# Altium PCB 电磁阀驱动板.PcbDoc
Units mm, origin at the board's own origin, x right, y up, seen from the top; angles counter-clockwise.
Board outline 55 x 54.99 mm, 2 copper layers (Top Layer, Bottom Layer); 70 components, 47 nets, 188 pads, 4 vias.
Unrouted connection lines stored in the file: 71.
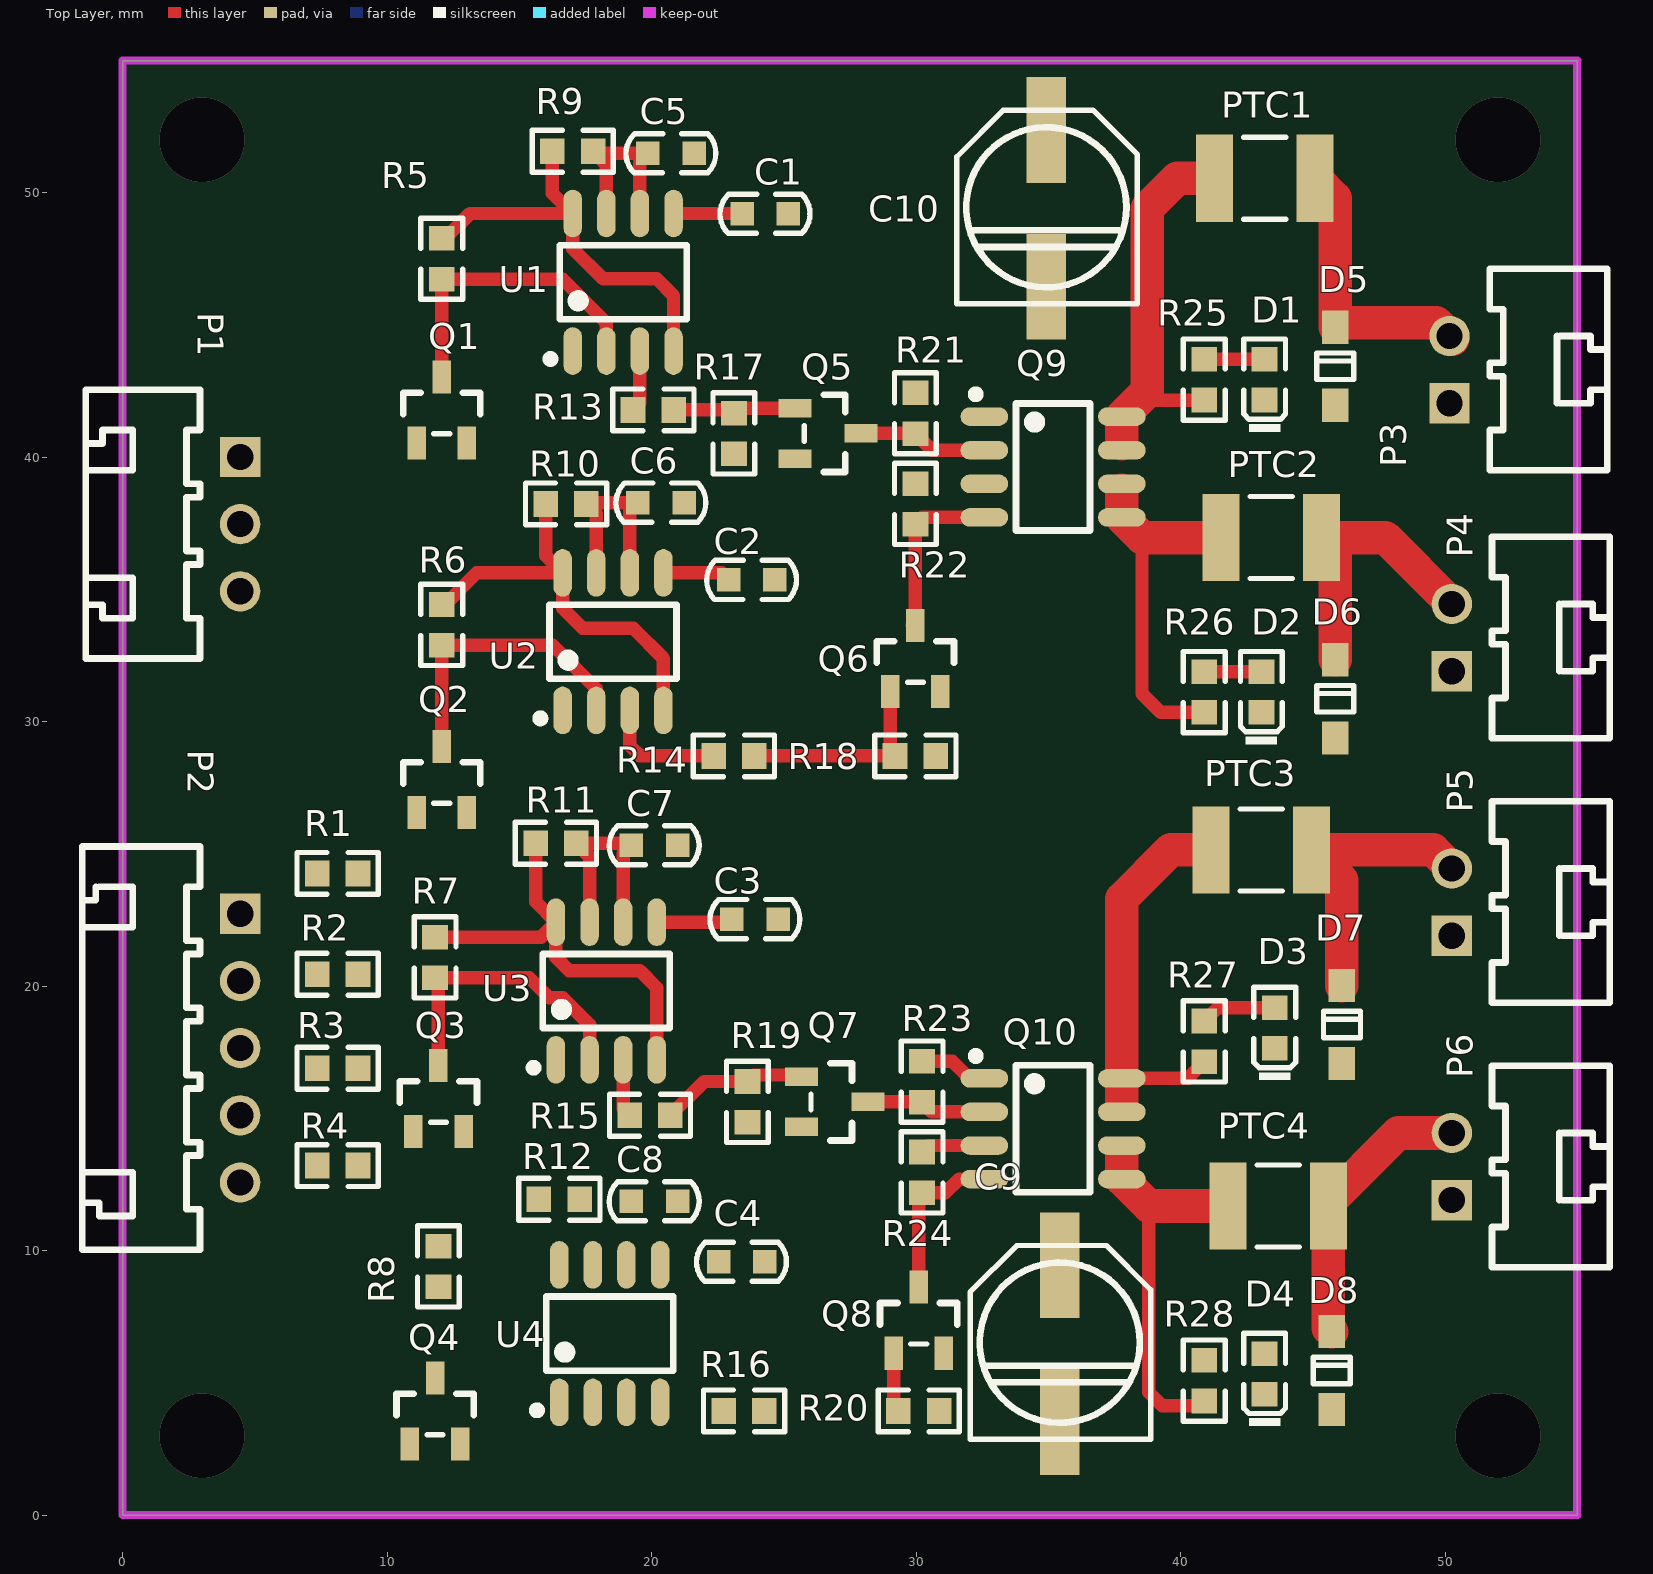
[diagram p0: Top Layer view]
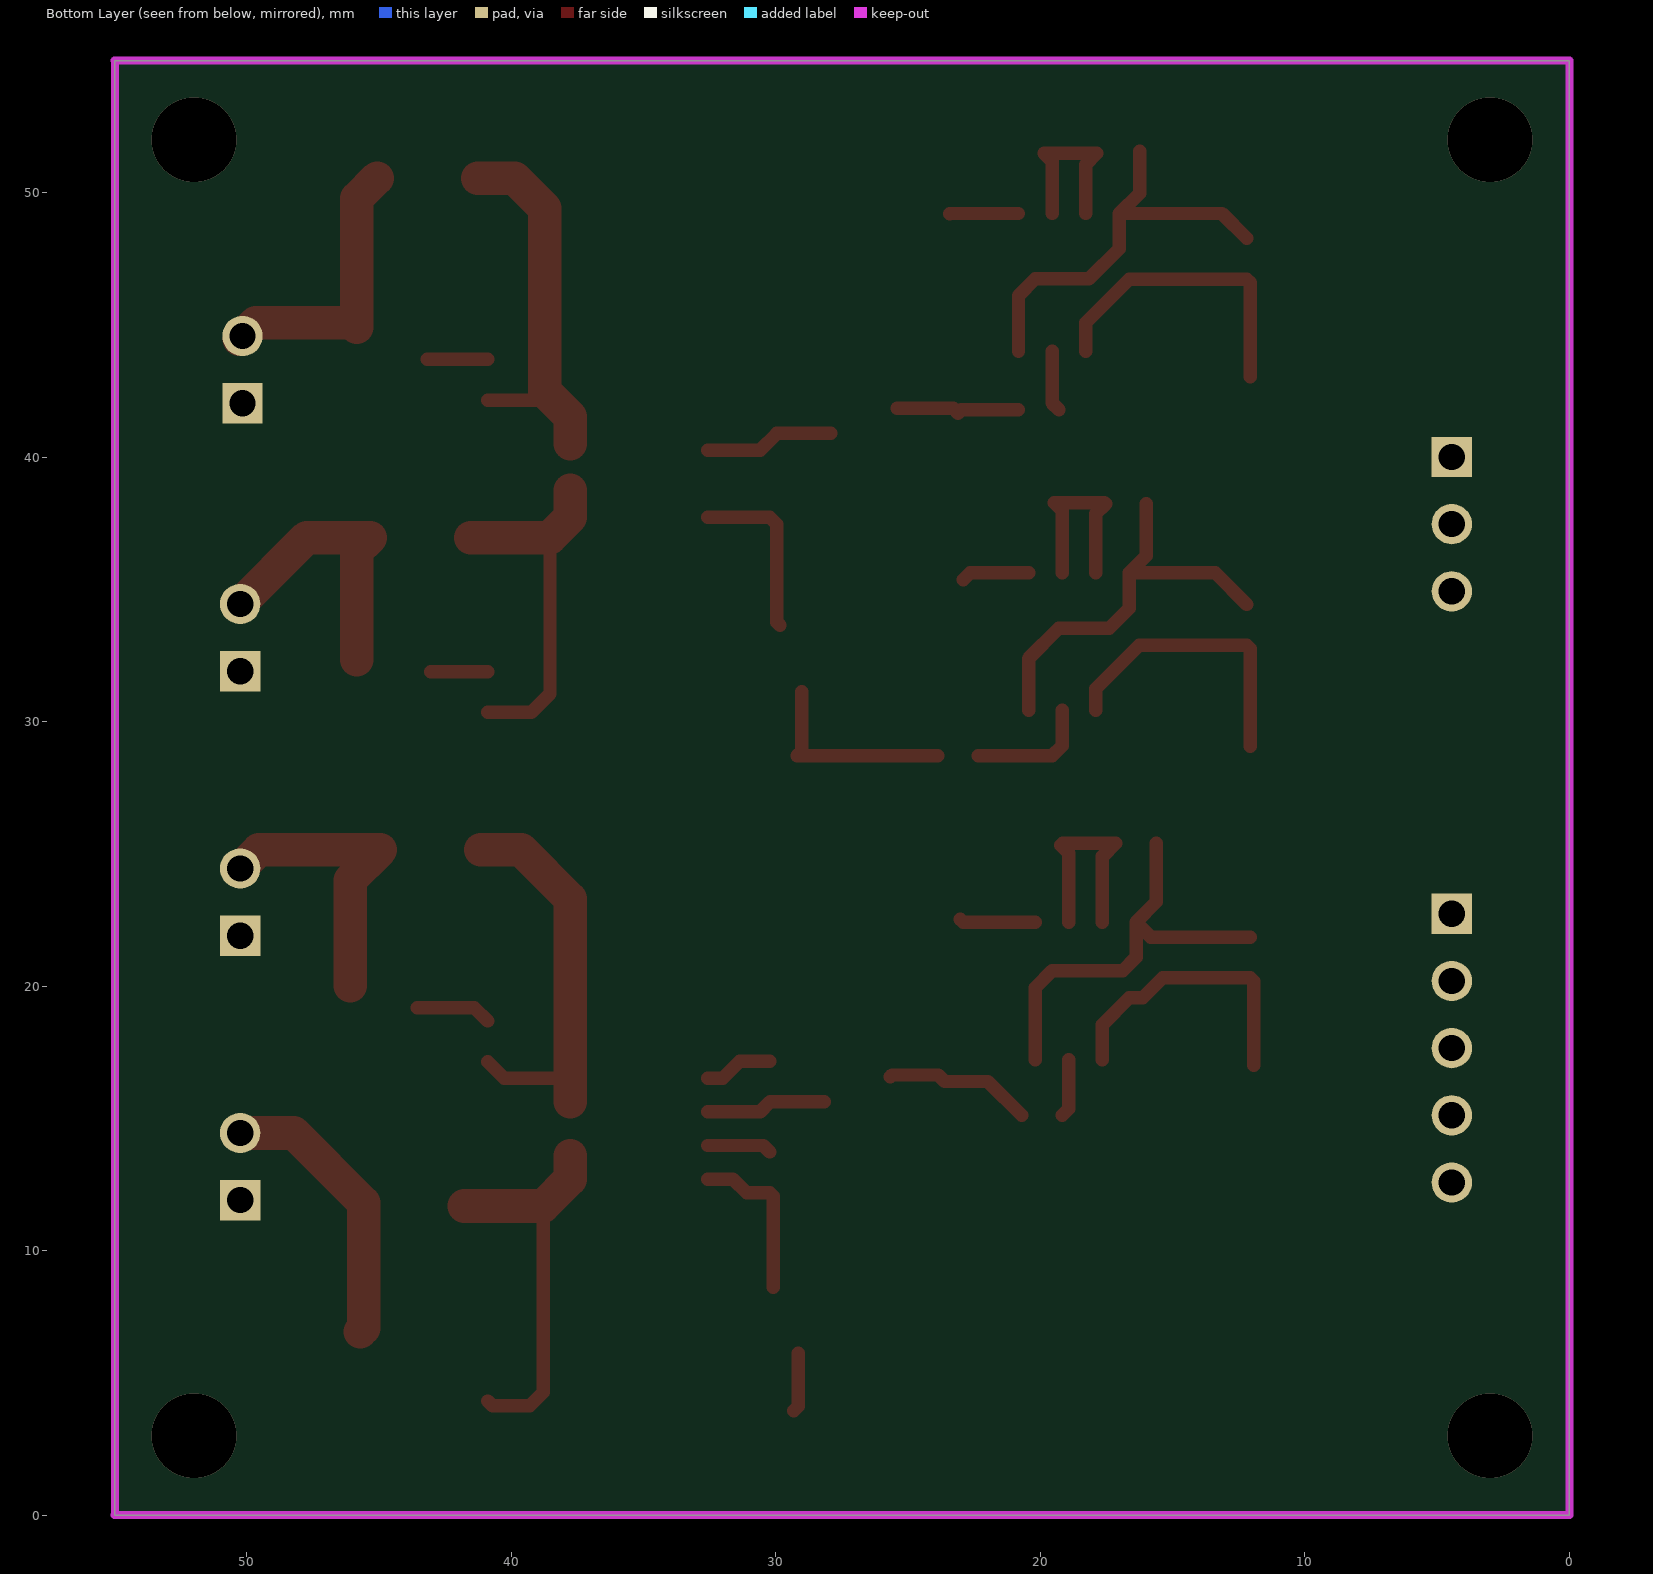
[diagram p1: Bottom Layer view, seen from below]

## Layer stack, top to bottom
Top Layer: signal copper 0.0356
Dielectric: dielectric 0.32, FR-4, Dk 4.8
Bottom Layer: signal copper 0.0356

## Board outline
0,54.991 54.991,54.991 54.991,0.009 55,0 0,0

## Design rules (kind name [scope] priority, off if disabled: settings)
Clearance [All] p1: gap=0.254
PolygonConnect [All] p1: connectstyle=Relief reliefconductorwidth=0.254 reliefentries=4 polygonreliefangle="90 Angle"
RoomDefinition 电磁阀驱动 [InComponentClass('电磁阀驱动')] p1: confinementstyle=ConfineIn formatcopy=TRUE outline 0,0 54.991,0 54.991,54.991 0,54.991
RoutingVias [All] p1: holewidth=0.711 width=1.27 viastyle="Through Hole" minholewidth=0.711 minwidth=1.27 maxholewidth=0.711 maxwidth=1.27
SilkscreenOverComponentPads [All] p1: minsilkscreentomaskgap=0.254
SolderMaskExpansion [All] p1: expansion=0.102
Width [All] p1: maxlimit=25.4 minlimit=0.254 preferedwidth=0.254
27 further rules are at their usual default settings.

## Components (designator, comment, footprint, x,y, rotation, side; value= is the part's Value field where it differs from the comment)
C1 "Cap" 0603C 24.257,49.149 r180 top
C2 "Cap" 0603C 23.749,35.306 r180 top
C3 "Cap" 0603C 23.876,22.479 r180 top
C4 "Cap" 0603C 23.368,9.525 r180 top
C5 "Cap" 0603C 20.701,51.435 r180 top
C6 "Cap" 0603C 20.32,38.227 r180 top
C7 "Cap" 0603C 20.066,25.273 r180 top
C8 "Cap" 0603C 20.066,11.811 r180 top
C9 "47uF 25v" CAP_SMD_6*7 35.433,6.477 r0 top
C10 "47uF 25v" CAP_SMD_6*7 34.925,49.403 r0 top
D1 "绿灯 0603" 0603_LED_S1 43.18,42.926 r90 top
D2 "绿灯 0603" 0603_LED_S1 43.053,31.115 r90 top
D3 "绿灯 0603" 0603_LED_S1 43.561,18.415 r90 top
D4 "绿灯 0603" 0603_LED_S1 43.18,5.334 r90 top
D5 "B5819W  SL" SOD-123 45.847,43.434 r270 top
D6 "B5819W  SL" SOD-123 45.847,30.861 r270 top
D7 "B5819W  SL" SOD-123 46.101,18.542 r270 top
D8 "B5819W  SL" SOD-123 45.72,5.461 r270 top
P1 "Header 3" sip-3 4.445,40.005 r270 top
P2 "Header 5" SIP-5 4.445,22.733 r270 top
P3 "Header 2" SIP-2 50.165,42.037 r90 top
P4 "Header 2" SIP-2 50.254,31.905 r90 top
P5 "Header 2" SIP-2 50.254,21.905 r90 top
P6 "Header 2" SIP-2 50.254,11.905 r90 top
PTC1 "SMD1812P300TF/16" 1812 43.18,50.546 r0 top
PTC2 "SMD1812P300TF/16" 1812 43.434,36.957 r0 top
PTC3 "SMD1812P300TF/16" 1812 43.053,25.146 r0 top
PTC4 "SMD1812P300TF/16" 1812 43.688,11.684 r0 top
Q1 "SS8050 Y1" SOT-23(SOT-23-3) 12.065,41.783 r270 top
Q2 "SS8050 Y1" SOT-23(SOT-23-3) 12.065,27.813 r270 top
Q3 "SS8050 Y1" SOT-23(SOT-23-3) 11.938,15.748 r270 top locked
Q4 "SS8050 Y1" SOT-23(SOT-23-3) 11.811,3.937 r270 top
Q5 "SS8050 Y1" SOT-23(SOT-23-3) 26.67,40.894 r180 top
Q6 "SS8050 Y1" SOT-23(SOT-23-3) 29.972,32.385 r270 top
Q7 "SS8050 Y1" SOT-23(SOT-23-3) 26.924,15.621 r180 top
Q8 "SS8050 Y1" SOT-23(SOT-23-3) 30.099,7.366 r270 top
Q9 "AO4803A" SOP-8_150mil 35.179,39.624 r270 top
Q10 "AO4803A" SOP-8_150mil 35.179,14.605 r270 top
R1 "100Ω  ±1%" 0603_R 8.128,24.257 r180 top locked
R2 "100Ω  ±1%" 0603_R 8.128,20.447 r180 top locked
R3 "100Ω  ±1%" 0603_R 8.128,16.891 r180 top locked
R4 "100Ω  ±1%" 0603_R 8.128,13.208 r180 top locked
R5 "10KΩ (102) ±1%" 0603_R 12.065,47.498 r90 top
R6 "10KΩ (102) ±1%" 0603_R 12.065,33.655 r90 top
R7 "10KΩ (102) ±1%" 0603_R 11.811,21.082 r90 top
R8 "10KΩ (102) ±1%" 0603_R 11.938,9.398 r90 top
R9 "3KΩ (3001) ±1%" 0603_R 17.018,51.562 r0 top locked
R10 "3KΩ (3001) ±1%" 0603_R 16.764,38.227 r0 top locked
R11 "3KΩ (3001) ±1%" 0603_R 16.383,25.4 r0 top locked
R12 "3KΩ (3001) ±1%" 0603_R 16.51,11.938 r0 top locked
R13 "3KΩ (3001) ±1%" 0603_R 20.066,41.783 r0 top
R14 "3KΩ (3001) ±1%" 0603_R 23.114,28.702 r0 top
R15 "3KΩ (3001) ±1%" 0603_R 19.939,15.113 r0 top
R16 "3KΩ (3001) ±1%" 0603_R 23.495,3.937 r0 top
R17 "10KΩ (102) ±1%" 0603_R 23.114,40.894 r90 top
R18 "10KΩ (102) ±1%" 0603_R 29.972,28.702 r180 top
R19 "10KΩ (102) ±1%" 0603_R 23.622,15.621 r90 top
R20 "10KΩ (102) ±1%" 0603_R 30.099,3.937 r180 top
R21 "10KΩ (102) ±1%" 0603_R 29.972,41.656 r90 top
R22 "10KΩ (102) ±1%" 0603_R 29.972,38.227 r90 top
R23 "10KΩ (102) ±1%" 0603_R 30.226,16.383 r90 top
R24 "10KΩ (102) ±1%" 0603_R 30.226,12.954 r90 top
R25 "3KΩ (3001) ±1%" 0603_R 40.894,42.926 r90 top
R26 "3KΩ (3001) ±1%" 0603_R 40.894,31.115 r90 top
R27 "3KΩ (3001) ±1%" 0603_R 40.894,17.907 r90 top
R28 "3KΩ (3001) ±1%" 0603_R 40.894,5.08 r90 top
U1 "NE555DR" SOIC-8_150mil 18.923,46.609 r0 top
U2 "NE555DR" SOIC-8_150mil 18.542,33.02 r0 top
U3 "NE555DR" SOIC-8_150mil 18.288,19.812 r0 top
U4 "NE555DR" SOIC-8_150mil 18.415,6.858 r0 top

## Footprints (in the part's own frame and the unit in brackets; to place one, negate y for a bottom-side part, rotate by r counter-clockwise, add the part's x,y. Pads: shape width x height; smd on the part's side, far side on the other; paste and mask are expansions set on the pad)
0603_LED_S1 [mm]
  rect 0.93x0.98 smd: A(0.77,0) K(-0.77,0)
  silkscreen extent -1.98,-0.79 1.54,0.79, body extent -0.8,-0.4 0.8,0.4, height 0.6
0603_R [mm]
  rect 0.93x0.98 smd: 1(-0.77,0) 2(0.77,0)
  silkscreen extent -1.53,-0.79 1.54,0.79, body extent -0.85,-0.4 0.85,0.4, height 0.56
0603C [mil]
  rect 35x35 smd: 1(-36,-2) 2(33,-2)
  silkscreen extent -68,-31 66,27
1812 [mm] "Chip Capacitor, Body 4.5x3.2mm, IPC Hig"
  rect 1.4x3.3 smd: 1(-1.9,0) 2(1.9,0)
  silkscreen extent -0.8,-1.55 0.8,1.55, body extent -2.4,-1.7 2.4,1.7, height 1.4
CAP_SMD_6*7 [mm] "贴"
  rect 1.5x4 smd: 1(0,2.965) 2(0,-2.965)
  silkscreen extent -3.39,-3.61 3.44,3.71, body extent -3.29,-3.51 3.31,3.49, height 5.4
SIP-2 [mil]
  rect 60x60 hole 39: 1(0,0)
  round 60 hole 39: 2(100,0)
  silkscreen extent -100,-235 200,-60
sip-3 [mil]
  rect 60x60 hole 39: 1(0,0)
  round 60 hole 39: 2(100,0) 3(200,0)
  silkscreen extent -100,-230 300,-60
SIP-5 [mil]
  rect 60x60 hole 39: 1(0,0)
  round 60 hole 39: 2(100,0) 3(200,0) 4(300,0) 5(400,0)
  silkscreen extent -100,-235 500,-60
SOD-123 [mm]
  rect 1.25x1 smd: 1(1.475,0) 2(-1.475,0)
  silkscreen extent -0.5,-0.7 0.5,0.7, body extent -1.85,-0.77 1.85,0.78, height 1.35
SOIC-8_150mil [mm]
  oval 0.7x1.8 smd: 1(-1.905,-2.6) 2(-0.635,-2.6) 3(0.635,-2.6) 4(1.905,-2.6) 5(1.905,2.6) 6(0.635,2.6) 7(-0.635,2.6) 8(-1.905,2.6)
  silkscreen extent -2.9,-3.05 2.4,1.4
SOP-8_150mil [mm]
  oval 0.7x1.8 smd: 1(-1.905,-2.6) 2(-0.635,-2.6) 3(0.635,-2.6) 4(1.905,-2.6) 5(1.905,2.6) 6(0.635,2.6) 7(-0.635,2.6) 8(-1.905,2.6)
  silkscreen extent -2.9,-3.07 2.4,1.4, body extent -2.5,-3.1 2.5,3.1, height 1.75
SOT-23(SOT-23-3) [mm]
  rect 1.25x0.7 smd: 1(1.25,-0.95) 2(1.25,0.95) 3(-1.25,0)
  silkscreen extent -0.65,-1.46 0.9,1.46, body extent -1.5,-1.5 1.5,1.5, height 1.3

## Part data
C1 C2 C3 C4 C5 C6 C7 C8: "Capac"
C9 C10: library part "Cap Pol1", "Polarized Capacitor (Radial)"
D1 D2 D3 D4: library part "0603 绿灯"
D5 D6 D7 D8: library part "SOD-123 B5819W  SL", "Ф"
P1: "Header, 3"
P2: "Header, 5"
P3 P4 P5 P6: "Header, 2"
PTC1 PTC2 PTC3 PTC4: library part "0603 3KΩ (3001) 1%", "贴片电阻"
Q1 Q2 Q3 Q4 Q5 Q6 Q7 Q8: library part "SOT-23 SS8050 Y1"
Q9 Q10: library part APM4953KC-TRG, "MOS(³"
R1 R2 R3 R4 R5 R6 R7 R8 R9 R10 R11 R12 R13 R14 R15 R16 R17 R18 R19 R20 R21 R22 R23 R24 R25 R26 R27 R28: library part "0603 3KΩ (3001) 1%"
U1 U2 U3 U4: library part NE555DR_[C7593]

## Via types
v1: diameter 3.2, hole 3.2, Top Layer to Bottom Layer, 4 vias

## Nets (pads, with @x,y where several pads share a name; then routed paths per layer and width w, separated by ;. In a path a pad name is that pad's centre, name@x,y a point inside that pad or via, vN(x,y) a via of type N, cw(c..) or ccw(c..) an arc to the next point about the centre after c; other vN are vias at no path point)
GND: C1.1 C2.1 C3.1 C4.1 C5.1 C6.1 C7.1 C8.1 C9.2 C10.2 D1.K D2.K D3.K D4.K D5.1 D6.1 D7.1 D8.1 P1.3 P2.5 P3.1 P4.1 P5.1 P6.1 Q1.2 Q2.2 Q3.2 Q4.2 Q5.2 Q6.2 Q7.2 Q8.2 R17.1 R18.1 R19.1 R20.1 U1.1 U2.1 U3.1 U4.1
NetC1_2: C1.2 U1.5 | length 2.6
  Top Layer w0.508: U1.5 23.41,49.209 C1.2
NetC2_2: C2.2 U2.5 | length 2.6
  Top Layer w0.508: U2.5 22.648,35.62 C2.2
NetC3_2: C3.2 U3.5 | length 2.9
  Top Layer w0.508: U3.5 22.92,22.412 C3.2
NetC4_2: C4.2 U4.5
NetC5_2: C5.2 R9.2 U1.6 U1.7 | length 6.9
  Top Layer w0.508: U1.7 18.288,51.062 17.864,51.486 C5.2 19.558,51.181 U1.6
NetC6_2: C6.2 R10.2 U2.6 U2.7 | length 7.5
  Top Layer w0.508: U2.7 17.907,37.854 R10.2 17.585,38.278 C6.2 19.177,37.973 U2.6
NetC7_2: C7.2 R11.2 U3.6 U3.7 | length 8.3
  Top Layer w0.508: U3.7 17.653,24.9 R11.2 19.152,25.4 C7.2 18.923,25.019 U3.6
NetC8_2: C8.2 R12.2 U4.6 U4.7
NetD1_A: D1.A R25.2 | length 2.3
  Top Layer w0.508: R25.2 D1.A
NetD2_A: D2.A R26.2 | length 2.2
  Top Layer w0.508: R26.2 D2.A
NetD3_A: D3.A R27.2 | length 2.9
  Top Layer w0.508: R27.2 41.402,19.185 D3.A
NetD4_A: D4.A R28.2
NetD5_2: D5.2 P3.2 PTC1.2 | length 10.7
  Top Layer w1.27: PTC1.2 45.847,49.779 D5.2 46.023,45.085 49.657,45.085 P3.2@50.292,44.45
NetD6_2: D6.2 P4.2 PTC2.2 | length 10.8
  Top Layer w1.27: D6.2 45.847,36.444 PTC2.2 47.742,36.957 P4.2
NetD7_2: D7.2 P5.2 PTC3.2 | length 11.2
  Top Layer w1.27: D7.2 46.101,23.998 PTC3.2 49.553,25.146 P5.2
NetD8_2: D8.2 P6.2 PTC4.2 | length 10.7
  Top Layer w1.27: D8.2 45.588,7.068 PTC4.2 45.588,11.806 48.227,14.445 P6.2
NetP2_1: P2.1 R1.2
NetP2_2: P2.2 R2.2
NetP2_3: P2.3 R3.2
NetP2_4: P2.4 R4.2
NetPTC1_1: PTC1.1 Q9.7 Q9.8 R25.1 | length 15.7
  Top Layer w0.508: Q9.8 38.406,42.156 R25.1
  Top Layer w1.27: Q9.7@37.779,40.513 Q9.8 38.735,42.485 38.735,49.403 39.878,50.546 PTC1.1
NetPTC2_1: PTC2.1 Q9.5 Q9.6 R26.1 | length 13.6
  Top Layer w0.508: 38.541,36.957 38.541,31.055 39.251,30.345 R26.1
  Top Layer w1.27: Q9.6@37.779,38.735 Q9.5 38.541,36.957 PTC2.1
NetPTC3_1: PTC3.1 Q10.7 Q10.8 R27.1 | length 15.2
  Top Layer w0.508: Q10.8 40.267,16.51 R27.1
  Top Layer w1.27: 37.779,15.621 Q10.8 37.779,23.301 39.624,25.146 PTC3.1
NetPTC4_1: PTC4.1 Q10.5 Q10.6 R28.1 | length 14.7
  Top Layer w0.508: 38.795,11.684 38.795,4.639 39.303,4.131 40.715,4.131 R28.1
  Top Layer w1.27: 37.779,13.589 Q10.5 38.795,11.684 PTC4.1
NetQ1_1: Q1.1 R1.1
NetQ1_3: Q1.3 R5.1 U1.2 | length 11.6
  Top Layer w0.508: Q1.3 12.065,46.601 12.192,46.728 16.645,46.728 18.288,45.085 U1.2
NetQ2_1: Q2.1 R2.1
NetQ2_3: Q2.3 R6.1 U2.2 | length 11.1
  Top Layer w0.508: Q2.3 12.065,32.758 12.192,32.885 16.264,32.885 17.907,31.242 U2.2
NetQ3_1: Q3.1 R3.1
NetQ3_3: Q3.3 R7.1 U3.2 | length 11
  Top Layer w0.508: Q3.3 11.938,20.185 12.065,20.312 15.375,20.312 16.129,19.558 16.637,19.558 17.653,18.542 U3.2
NetQ4_1: Q4.1 R4.1
NetQ4_3: Q4.3 R8.1 U4.2
NetQ5_1: Q5.1 R13.2 R17.2 | length 4.7
  Top Layer w0.508: R13.2 22.995,41.783 R17.2 23.294,41.844 Q5.1
NetQ5_3: Q5.3 Q9.2 R21.1 | length 4.9
  Top Layer w0.508: Q5.3 29.964,40.894 R21.1 30.599,40.259 Q9.2
NetQ6_1: Q6.1 R14.2 R18.2 | length 7.8
  Top Layer w0.508: R14.2 R18.2 29.022,28.882 Q6.1
NetQ6_3: Q6.3 Q9.4 R22.1 | length 6.6
  Top Layer w0.508: Q6.3@29.845,33.635 29.972,33.762 R22.1 30.234,37.719 Q9.4
NetQ7_1: Q7.1 R15.2 R19.2 | length 5.6
  Top Layer w0.508: R15.2 21.987,16.391 R19.2 23.868,16.637 25.608,16.637 Q7.1
NetQ7_3: Q7.3 Q10.2 R23.1 | length 4.6
  Top Layer w0.508: Q7.3 30.218,15.621 R23.1 30.599,15.24 Q10.2
NetQ8_1: Q8.1 R16.2 R20.2 | length 2.3
  Top Layer w0.508: Q8.1 29.149,4.117 R20.2
NetQ8_3: Q8.3 Q10.4 R24.1 | length 6.2
  Top Layer w0.508: Q8.3 30.099,12.057 R24.1 31.107,12.184 31.623,12.7 Q10.4
NetR13_1: R13.1 U1.3 | length 2.3
  Top Layer w0.508: R13.1 19.558,42.045 U1.3
NetR14_1: R14.1 U2.3 | length 4.7
  Top Layer w0.508: U2.3 19.177,29.083 19.558,28.702 R14.1
NetR15_1: R15.1 U3.3 | length 2.2
  Top Layer w0.508: U3.3 18.923,15.359 R15.1
NetR16_1: R16.1 U4.3
"VCC 5V": P1.1 R5.2 R6.2 R7.2 R8.2 R9.1 R10.1 R11.1 R12.1 U1.4 U1.8 U2.4 U2.8 U3.4 U3.8 U4.4 U4.8 | length 47.8
  Top Layer w0.508: R7.2@12.065,21.852 15.823,21.852 U3.8 ; R6.2@12.192,34.425 13.387,35.62 U2.8 ; R5.2@12.192,48.268 13.133,49.209 U1.8 ; R11.1 15.613,23.182 U3.8 ; R10.1 15.994,36.263 U2.8 ; R9.1 16.248,49.979 U1.8 ; U3.4 20.193,19.939 19.558,20.574 16.891,20.574 16.383,21.082 U3.8 ; U2.4 20.447,32.385 19.304,33.528 17.399,33.528 16.637,34.29 U2.8 ; U1.4 20.828,46.101 20.193,46.736 18.161,46.736 17.018,47.879 U1.8
"VCC  12V": C9.1 C10.1 P1.2 Q9.1 Q9.3 Q10.1 Q10.3 R21.2 R22.2 R23.2 R24.2 | length 5.1
  Top Layer w0.508: R24.2 30.472,13.97 Q10.3 ; R23.2 31.361,17.153 32.004,16.51 Q10.1
copper on no net:
  other v1: 3,3 52,3 3,52 52,52

## Keep-outs
Keep-Out Layer:
  lines w0.3: 0,54.991 55,54.991 ; 0,55 0,0 55,0 ; 54.991,0 54.991,54.991
  text "+5V" at 4.775,41.65 h3
  text "+12V" at 6.1,37 h3
  text "GND" at 4.3,31.3 h3

## Dimensions
52.575,53.575 to 51.825,50.375 on Keep-Out Layer
3,52 to 3,3 on Keep-Out Layer
3,52 to 52,53.854 on Keep-Out Layer
0,55 to 0,0 on Keep-Out Layer
0,55 to 55,54.991 on Keep-Out Layer